# Altium PCB STM32F103.PcbDoc (part 2 of 5)
Units mil, origin at the board's own origin, x right, y up, seen from the top; angles counter-clockwise.
Board outline 3951 x 3526 mil, 2 copper layers (Top Layer, Bottom Layer); 148 components, 169 nets, 748 pads, 448 vias.
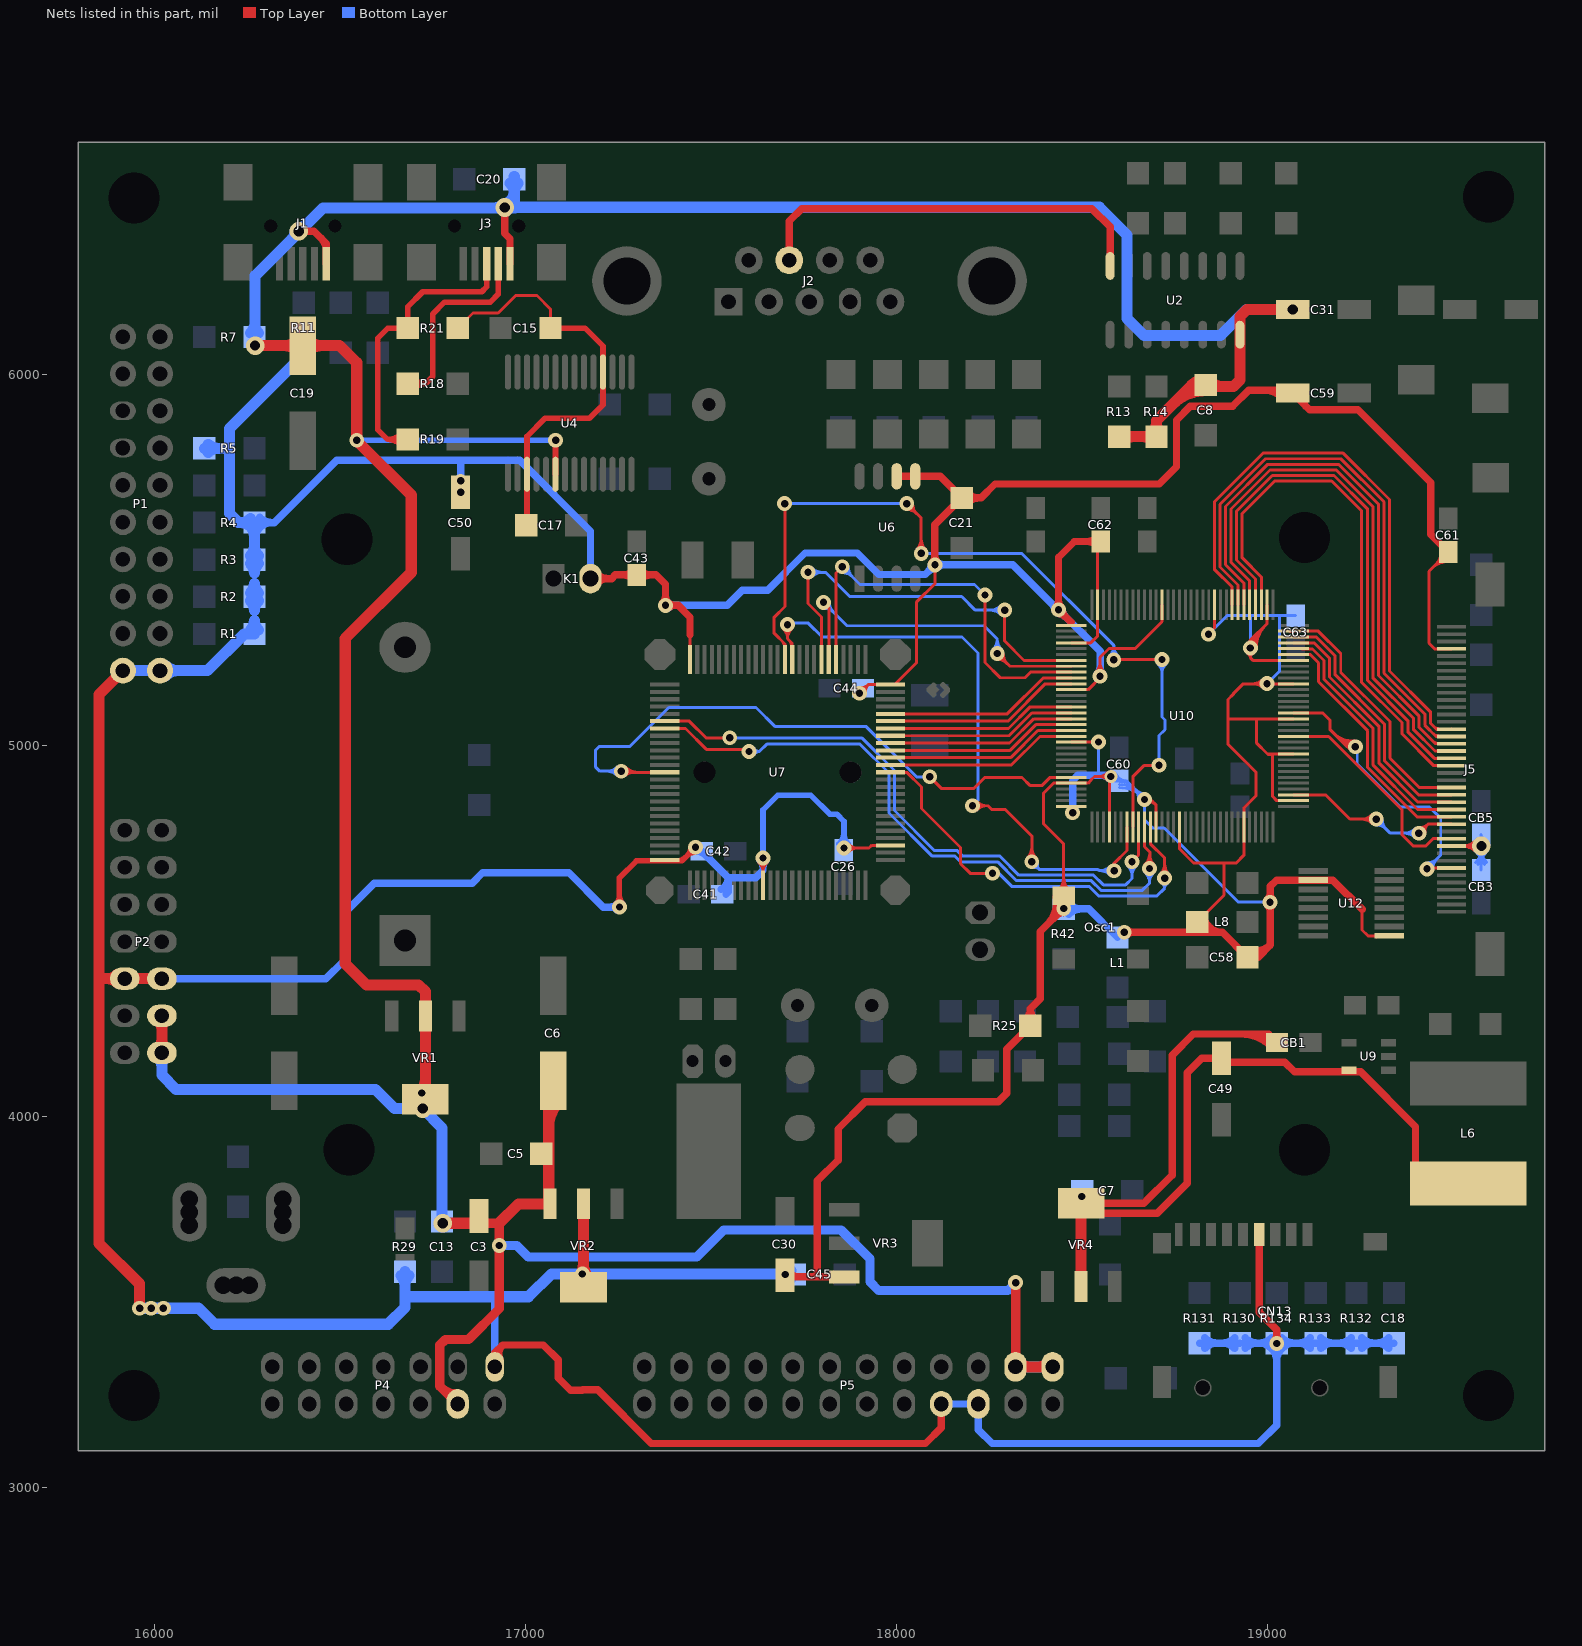
[diagram p2: the nets of this part, all layers, seen from the top]

## Via types
v1: diameter 40, hole 19.68, Top Layer to Bottom Layer, 402 vias
v2: diameter 35, hole 19.68, Top Layer to Bottom Layer, 21 vias
v3: diameter 50, hole 27.56, Top Layer to Bottom Layer, 19 vias
v4: diameter 40, hole 20, Top Layer to Bottom Layer, 6 vias

## Nets (pads, with @x,y where several pads share a name; then routed paths per layer and width w, separated by ;. In a path a pad name is that pad's centre, name@x,y a point inside that pad or via, vN(x,y) a via of type N, cw(c..) or ccw(c..) an arc to the next point about the centre after c; other vN are vias at no path point) (continued)
+3.3: C18.1 C21.1 C26.2 C30.1 C41.2 C42.2 C43.2 C44.2 C45.1 C50.1 C58.2 C59.1 C60.1 C61.1 C62.1 C63.1 CN13.4 J5.4 K1.2 L1.1 L8.1 Osc1.4 P1.1 P1.2 P2.9 P2.10 P4.14 P5.17 P5.19 R1.2 R2.2 R3.2 R4.2 R5.2 R11.1 R25.1 R29.1 R42.2 R130.1 R131.1 R132.1 R133.1 R134.1 U6.5 U6.6 U7.11 U7.28 U7.50 U7.75 U7.100 U10.4 U10.12 U10.16 U10.27 U10.34 U10.42 U10.48 U10.54 U10.58 U10.66 U10.75 U10.84 U10.95 U10.97 U10.100 U10.108 U10.117 U10.124 U10.128 U12.1 U12.10 VR2.4 VR3.3 | length 32721.9
  Top Layer w8: VR2.4@17153,3765.2 17153,3727.86 VR2.4@17157.55,3727.86 ; U7.75@17443,5232.27 17443,5299 ; v1@17628.54,4685.69 cw(c17601.22,4658.37) 17639.85,4658.37 cw(c17678.48,4658.37) v1@17651.16,4685.69 ; U7.11@17639.85,4624 v1(17639.85,4697) ; C30.1@17694.14,3560.11 cw(c17691.33,3552.98) C30.1@17699,3552.98 ; C30.1@17699,3568.45 C30.1@17699,3553 ; C30.1@17704.05,3559.52 ccw(c17705.76,3552.98) C30.1@17699,3552.98 ; v1(17858,4724) 17925.72,4724 17933,4731.28 U7.28@17983.35,4731.28 ; v1@17869.31,4712.69 cw(c17896.63,4685.37) 17896.63,4724 cw(c17896.63,4762.63) v1@17869.31,4735.31 ; v1(17900,5141) 17923.35,5164.35 ; v1@17901.87,5156.89 ccw(c17904.91,5182.8) 17923.35,5164.35 ; v1@17915.89,5142.87 cw(c17941.8,5145.91) 17923.35,5164.35 ; v1(18103,5487) 18103,5436 18053,5386 18053,5222.35 17995,5164.35 U7.50@17983.35,5164.35 17923.35,5164.35 ; Osc1.4@18435.15,4609.85 ccw(c18399.3,4645.7) 18450,4645.7 ccw(c18500.7,4645.7) Osc1.4@18464.85,4609.85 ; Osc1.4@18439.8,4573.33 ccw(c18421.88,4595) Osc1.4@18450,4595 ; Osc1.4@18440.81,4604.19 ccw(c18418.62,4626.38) 18450,4626.38 ccw(c18481.38,4626.38) Osc1.4@18459.19,4604.19 ; Osc1.4@18441.11,4575.98 cw(c18434.57,4562) v1@18450,4562 ; U10.128@18441.91,4835.91 U10.128@18470.79,4835.91 ; v1@18450,4544 v1(18450,4561) v1@18450,4562 ; Osc1.4@18458.89,4575.98 ccw(c18465.43,4562) v1@18450,4562 ; Osc1.4@18460.2,4573.33 cw(c18478.12,4595) Osc1.4@18450,4595 ; U10.117@18470.79,5009.13 v1@18544,5009.13 ; U10.108@18470.79,5150.87 18515.93,5150.87 v1@18550.03,5184.97 ; U10.100@18470.79,5276.85 18522.85,5276.85 18541.65,5295.65 U10.95@18541.65,5379.21 18541.65,5533.65 C62.1@18550,5542 ; U10.97@18470.79,5324.09 18470.79,5333 ; v1@18536.69,5198.31 ccw(c18509.37,5225.63) 18548,5225.63 ccw(c18586.63,5225.63) v1@18559.31,5198.31 ; v1(18548,5187) 18548,5237.84 18572.16,5262 18642.82,5262 18714.88,5334.07 U10.84@18714.88,5379.21 ; v2@18567.45,4907.45 ccw(c18544.41,4884.41) 18544.41,4917 ccw(c18544.41,4949.59) v2@18567.45,4926.55 ; v2@18571,4908 18573.15,4905.85 U10.4@18573.15,4780.79 ; v2(18577,4917) 18533,4917 18523.13,4907.13 18523.13,4906.09 18515.93,4898.9 U10.124@18470.79,4898.9 18422.35,4898.9 18396,4872.55 18396,4789 18450,4735 Osc1.4@18450,4595 ; v1@18670.56,4847.42 cw(c18679.1,4822.07) 18698.01,4840.99 ; 18688.9,4850.1 ccw(c18674.5,4835.71) v1(18668,4855) 18684,4855 18699.13,4839.87 U10.12@18699.13,4780.79 ; U10.16@18762.13,4780.79 18762.13,4721.87 18800,4684 18882,4684 ; L8.1@18810,4525 18882,4597 18882,4684 ; v1(18840,5300) 18856.61,5316.61 U10.75@18856.61,5379.21 ; v1@18945,5263 cw(c18976.38,5263) 18954.19,5285.19 ; v1@18945.79,5248.72 cw(c18939.88,5237) 18953,5237 ; v1@18948.75,5278.43 ccw(c18947.22,5284) 18953,5284 ; v1@18957.25,5278.43 cw(c18958.78,5284) 18953,5284 ; 18958.44,5166.61 ccw(c18958.44,5206.56) v1@18986.69,5178.31 ; v1@18960.21,5248.72 ccw(c18966.12,5237) 18953,5237 ; 18960.3,5166.61 cw(c18960.3,5129.3) v1@18986.69,5155.69 ; v1@18961,5263 cw(c19031.01,5263) 18981.51,5312.51 ; 18967.85,5298.85 ccw(c19003.7,5263) v1(18953,5263) ; v1@18969,5263 cw(c19058.33,5263) 18995.16,5326.16 ; 18977.75,5166.61 ccw(c18977.75,5187.25) v1@18992.34,5172.66 ; v1@18998,5166.61 18933.77,5166.61 18907,5139.84 18907,5138.16 18893,5124.16 18893,5072 ; U10.66@18998.35,5379.21 18998.35,5329.35 18953,5284 ; v1@19000,5166.61 U10.54@19069.21,5166.61 ; U10.34@19069.21,4851.65 19024,4851.65 19013,4862.65 19013,4975.64 19001.36,4975.64 18999.36,4977.64 ; U10.42@19069.21,4977.64 18999.36,4977.64 ; U10.48@19069.21,5072.13 18970,5072.13 ; U10.58@19069.21,5229.61 19068.61,5229 18961,5229 18953,5237 ; 19254,4559 19254,4503.5 19270,4487.5 U12.1@19327.36,4487.5 ; U12.1@19293.13,4484.76 ccw(c19286.51,4478.15) 19286.51,4487.5 ccw(c19286.51,4496.85) U12.1@19293.13,4490.24 ; 19442.09,5477.62 cw(c19486.48,5433.23) C61.1@19486.48,5496 ; 19454.16,5489.69 ccw(c19426.85,5517) C61.1@19465.48,5517 ; 19455.75,5491.27 cw(c19486.48,5460.54) C61.1@19486.48,5504 ; C61.1@19486.48,5522 19434,5469.52 19434,5275.95 19449,5260.95 J5.4@19495,5260.95 ; v1@18450,4562 Osc1.4@18450,4595 ; 18882,4684 18915,4684 18935.35,4704.35 U10.27@18935.35,4780.79 18935.35,4831.72 18967.74,4864.11 18967.74,4928.83 18893,5003.57 18893,5072 ; 18893,5072 18893.13,5072.13 18970,5072.13 ; 18953,5237 v1(18953,5263) ; v1(18953,5263) 18953,5284 ; 18970,5072.13 18970,5063.16 18969,5062.16 18969,5008 18999.36,4977.64
  Top Layer w15: v1@17244.16,4573.84 ccw(c17222.82,4595.18) 17253,4595.18 ccw(c17283.18,4595.18) v1@17261.84,4573.84 ; v1(17253,4565) 17253,4644 17298.5,4689.5 17421.5,4689.5 v1(17458,4726) ; U7.100@17408.96,4689.91 ccw(c17408.96,4721.2) 17431.08,4699.08 ; v1@17445.5,4726 cw(c17415.32,4726) 17436.66,4704.66 cw(c17458,4683.32) v1@17458,4713.5
  Top Layer w20: P4.14@16917,3326 16917,3364 16938,3385 ; P4.14@16930.76,3346.97 cw(c16962.33,3360.66) 16938,3385 ; K1.2@17175,5450 17232,5450 17242,5460 C43.2@17300,5460 17351.46,5460 17377,5434.46 v1(17377,5378) 17411,5378 17443,5346 17443,5299 ; K1.2@17189.14,5435.86 cw(c17223.28,5401.72) 17223.28,5450 cw(c17223.28,5498.28) K1.2@17189.14,5464.14 ; C43.2@17289.39,5449.39 ccw(c17263.79,5423.79) 17263.79,5460 ccw(c17263.79,5496.21) C43.2@17289.39,5470.61 ; C43.2@17310.61,5449.39 cw(c17336.21,5423.79) 17336.21,5460 cw(c17336.21,5496.21) C43.2@17310.61,5470.61 ; v1@17369.93,5385.07 ccw(c17352.86,5402.14) 17377,5402.14 ccw(c17401.14,5402.14) 17384.07,5385.07 ccw(c17401.14,5402.14) 17401.14,5378 ccw(c17401.14,5353.86) v1@17384.07,5370.93 ; C30.1@17699,3573.32 17703.87,3568.45 17786,3568.45 ; C30.1@17707.07,3582.07 ccw(c17739.96,3614.96) 17739.96,3568.45 ; VR3.3@17829.72,3562.99 ccw(c17816.54,3549.82) 17816.54,3568.45 ccw(c17816.54,3587.08) VR3.3@17829.72,3573.9 ; VR3.3@17858.8,3568.45 17786,3568.45 ; U6.6@18000,5725.59 U6.5@18050,5725.59 18116.91,5725.59 C21.1@18175,5667.5 ; v1@18095.93,5494.07 ccw(c18078.86,5511.14) 18103,5511.14 ccw(c18127.14,5511.14) v1@18110.07,5494.07 ; v1(18103,5487) 18103,5595.5 C21.1@18175,5667.5 ; P5.17@18120,3226 18120,3162 18077.5,3119.5 17338.5,3119.5 17194,3264 17154.33,3264 17153.33,3263 17121,3263 17088,3296 17088,3345 17048,3385 16938,3385 ; C21.1@18189.14,5653.36 cw(c18223.28,5619.22) 18223.28,5667.5 cw(c18223.28,5715.78) C21.1@18189.14,5681.64 ; R25.1@18346.29,4259.56 ccw(c18316.41,4291.3) 18360,4291.3 ; R25.1@18373.71,4259.56 cw(c18403.59,4291.3) 18360,4291.3 ; 18406,4518 ccw(c18345,4579.01) Osc1.4@18430.19,4592.63 ; v1@18428.93,5373.07 ccw(c18411.86,5390.14) 18436,5390.14 ccw(c18460.14,5390.14) v1@18443.07,5373.07 ; 18431.22,4543.22 cw(c18450,4524.44) v1@18450,4551 ; 18433.64,4545.64 ccw(c18418.27,4561) v1@18440,4561 ; 18433.71,4545.71 ccw(c18392.77,4586.65) Osc1.4@18449.94,4595.79 ; v1@18436,5356 cw(c18436,5331.86) 18453.07,5348.93 cw(c18470.14,5366) v1@18446,5366 ; v1@18450,4562 18387,4499 18387,4318.3 18360,4291.3 ; 18470.79,5333 18469,5333 v1(18436,5366) 18436,5507 18479,5550 C62.1@18550,5550 ; C62.1@18539.39,5539.39 ccw(c18513.79,5513.79) 18513.79,5550 ccw(c18513.79,5586.21) C62.1@18539.39,5560.61 ; v1(18613,4497) 18878,4497 ; v1@18620.07,4489.93 cw(c18637.14,4472.86) 18637.14,4497 cw(c18637.14,4521.14) v1@18620.07,4504.07 ; L8.1@18791.15,4518.3 ccw(c18821.33,4529.03) L8.1@18821.33,4497 ; L8.1@18810,4525 ccw(c18849.67,4539.1) 18849.67,4497 ; L8.1@18828.85,4531.7 ccw(c18878,4549.16) 18878,4497 ; C58.2@18950.91,4449.11 ccw(c18967.44,4502.56) 19007,4463 ; CN13.4@18976.69,3682.69 18976.69,3473.31 19024,3426 v1(19024,3389) ; 18983.55,4439.55 cw(c18956.36,4466.73) C58.2@18945,4430 ; 18990.68,5958 cw(c18990.68,5893.05) C59.1@19036.61,5938.98 ; v1@18998.93,4570.93 cw(c18979.44,4551.44) 19007,4551.44 ; v1@18998.93,4585.07 ccw(c18979.44,4604.56) 19007,4604.56 ; 19007,4556.27 cw(c19027.73,4556.27) v1@19013.07,4570.93 ; 19007,4599.73 ccw(c19027.73,4599.73) v1@19013.07,4585.07 ; v1@19016.93,3396.07 ccw(c18999.86,3413.14) 19024,3413.14 ccw(c19048.14,3413.14) v1@19031.07,3396.07 ; C59.1@19067.32,5950 19112.32,5905 19243.04,5905 19439,5709.04 19439,5569.48 C61.1@19486.48,5522 ; C59.1@19067.32,5958 18949,5958 18905,5914 18791,5914 18754,5877 18754,5751.7 18707.3,5705 18265,5705 18227.5,5667.5 C21.1@18175,5667.5 ; C59.1@19099.93,5941.28 ccw(c19117.24,5929.61) 19102.48,5914.84 ; 19254,4559 19175.5,4637.5 U12.10@19122.64,4637.5 19024.5,4637.5 19024,4638 19007,4621 19007,4463 ; 17786,3568.45 17786,3827 17842,3883 17842,3966.99 17915.01,4040 18274,4040 18297,4063 18297,4182 R25.1@18360,4245 18360,4291.3 ; 18878,4497 C58.2@18945,4430 ; C58.2@18945,4430 18974,4430 19007,4463
  Top Layer w30: P2.9@15899.39,4361.39 ccw(c15873.79,4335.79) 15873.79,4372 ccw(c15873.79,4408.21) P2.9@15899.39,4382.61 ; P1.2@15915,5202 15851,5138 15851,4372 ; v1(15960,3484) 15960,3550 15851,3659 15851,4372 ; P2.10@16020,4372 P2.9@15920,4372 15851,4372 ; VR2.4@17137.38,3559.42 ccw(c17092.41,3604.38) 17156,3604.38 ccw(c17219.59,3604.38) VR2.4@17174.62,3559.42 ; VR2.4@17156,3576 VR2.4@17156,3765.2
  Bottom Layer w8: R1.2@16251.12,5319.38 ccw(c16206.73,5363.77) 16269.5,5363.77 ccw(c16332.27,5363.77) R1.2@16287.88,5319.38 ; R2.2@16251.12,5382.62 cw(c16206.73,5338.23) 16269.5,5338.23 cw(c16332.27,5338.23) R2.2@16287.88,5382.62 ; R2.2@16251.12,5419.38 ccw(c16206.73,5463.77) 16269.5,5463.77 ccw(c16332.27,5463.77) R2.2@16287.88,5419.38 ; R3.2@16251.12,5482.62 cw(c16206.73,5438.23) 16269.5,5438.23 cw(c16332.27,5438.23) R3.2@16287.88,5482.62 ; R1.2@16256.77,5313.73 ccw(c16226.04,5344.46) 16269.5,5344.46 ccw(c16312.96,5344.46) R1.2@16282.23,5313.73 ; R2.2@16256.77,5388.27 cw(c16226.04,5357.54) 16269.5,5357.54 cw(c16312.96,5357.54) R2.2@16282.23,5388.27 ; R2.2@16256.77,5413.73 ccw(c16226.04,5444.46) 16269.5,5444.46 ccw(c16312.96,5444.46) R2.2@16282.23,5413.73 ; R3.2@16256.77,5488.27 cw(c16226.04,5457.54) 16269.5,5457.54 cw(c16312.96,5457.54) R3.2@16282.23,5488.27 ; R1.2@16269.5,5301 R2.2@16269.5,5401 R3.2@16269.5,5501 ; C44.2@17913,5139 C44.2@17916,5142 ; 18544,4920 v1(18544,5010) ; C60.1@18588,4905 C60.1@18620,4905 ; C60.1@18600,4887 cw(c18600,4795.26) v1@18664.87,4860.13 ; C60.1@18600,4895 cw(c18600,4822.57) 18651.21,4873.79 ; C60.1@18600,4903 cw(c18600,4849.89) 18637.56,4887.44 ; 18639.27,4885.73 cw(c18608.54,4855) v1@18652,4855 ; 18644.1,4880.9 ccw(c18668,4904.8) v1@18668,4871 ; 18652.93,4872.07 cw(c18635.86,4855) v1@18660,4855 ; v1(18668,4855) 18668,4800 18690,4778 18720.85,4778 18920.85,4578 v1(19006,4578) ; v1@18669,4856 C60.1@18620,4905 ; v1(18840,5300) 18890,5350 18953,5350 ; R130.1@18925,3390 R130.1@18935,3390 ; v1(18953,5263) 18953,5350 ; v1(18998,5167) 19032,5201 19032,5349 ; C63.1@19075,5350 18953,5350 ; C60.1@18620,4905 cw(c18620,4940.5) 18588.85,4923.47 ccw(c18620,4940.5) C60.1@18620,4905 ; v2@18574.81,4915.8 ccw(c18593.02,4925.76) 18593.02,4905 cw(c18593.02,4925.76) v2@18574.81,4915.8 ; C60.1@18581.83,4919.64 ccw(c18606.51,4933.13) 18606.51,4905 cw(c18606.51,4933.13) C60.1@18581.83,4919.64
  Bottom Layer w15: v1(17639.85,4697) 17639.85,4826.85 17679,4866 17769,4866 17820,4815 17839,4815 17858,4796 v1(17858,4724) ; C26.2@17844.63,4735.37 ccw(c17812.34,4767.66) 17858,4767.66 ; C26.2@17849.16,4732.84 ccw(c17827.82,4754.18) 17858,4754.18 ccw(c17888.18,4754.18) C26.2@17866.84,4732.84 ; 17858,4762.83 ccw(c17896.83,4762.83) C26.2@17869.37,4735.37
  Bottom Layer w20: P2.9@15920,4372 P2.10@16020,4372 16462,4372 16511,4421 16511,4548 16592,4629 16856,4629 16885,4658 17116,4658 17209,4565 v1(17253,4565) ; R4.2@16269.5,5601 16323,5601 16491,5769 16984,5769 17175,5578 K1.2@17175,5450 ; R4.2@16283.64,5586.86 cw(c16317.78,5552.72) 16317.78,5601 cw(c16317.78,5649.28) R4.2@16283.64,5615.14 ; v1@16817.93,5689.75 ccw(c16800.86,5706.82) 16825,5706.82 ccw(c16849.14,5706.82) v1@16832.07,5689.75 ; v2@16819.7,5708.7 cw(c16806.89,5695.89) 16825,5695.89 cw(c16843.11,5695.89) v2@16830.3,5708.7 ; v2@16819.7,5719.3 ccw(c16806.89,5732.11) 16825,5732.11 ccw(c16843.11,5732.11) v2@16830.3,5719.3 ; 16824,5769 16825,5768 v1(16825,5682.68) ; 16915,3515 16917,3513 P4.14@16917,3326 ; v1@17245.93,4557.93 ccw(c17228.86,4540.86) 17228.86,4565 ccw(c17228.86,4589.14) v1@17245.93,4572.07 ; v1(17377,5378) 17543.67,5378 17584.33,5418.66 17652.66,5418.66 17753,5519 17894,5519 17952,5461 18077,5461 v1(18103,5487) 18313,5487 v1@18435,5365 ; v1@17384.07,5370.93 cw(c17401.14,5353.86) 17401.14,5378 cw(c17401.14,5402.14) v1@17384.07,5385.07 ; C42.2@17458,4716 cw(c17458,4677.37) C42.2@17485.31,4704.69 ; C42.2@17475,4715 17546,4644 ; C41.2@17527.76,4613.14 ccw(c17510.77,4644) 17546,4644 ; C41.2@17540,4600 17546,4606 17546,4644 ; v1@17632.78,4689.93 cw(c17615.71,4672.86) 17639.85,4672.86 cw(c17663.99,4672.86) v1@17646.92,4689.93 ; v1@17639.85,4699 v1(17639.85,4697) 17639.85,4663.85 17620,4644 17546,4644 ; v1(17700,3575) v1@17684,3575 ; C45.1@17709.24,3562.69 ccw(c17684,3542.98) v1@17684,3575 ; C45.1@17709.24,3587.31 cw(c17684,3607.02) v1@17684,3575 ; v1@18093,5487 cw(c18068.86,5487) 18085.93,5469.93 cw(c18103,5452.86) v1@18103,5477 ; v1@18110.07,5479.93 cw(c18127.14,5462.86) 18127.14,5487 cw(c18127.14,5511.14) v1@18110.07,5494.07 ; P5.17@18120,3226 P5.19@18220,3226 18220,3157 18257.5,3119.5 18974.5,3119.5 19024,3169 v1(19024,3389) R134.1@19024,3390 ; 18415.51,5384.49 ccw(c18436,5404.97) v1@18436,5376 ; 18420.34,5379.66 cw(c18406.69,5366) v1@18426,5366 ; v1@18436,5356 cw(c18436,5331.86) 18453.07,5348.93 cw(c18470.14,5366) v1@18446,5366 ; v1(18436,5366) 18548,5254 v1(18548,5187) ; R42.2@18450,4560 18518,4560 L1.1@18595,4483 ; R42.2@18457.07,4553.93 cw(c18471.73,4539.27) R42.2@18471.73,4560 ; R42.2@18457.07,4568.07 ccw(c18476.56,4587.56) R42.2@18476.56,4560 ; R42.2@18464.14,4545.86 cw(c18498.28,4511.72) 18498.28,4560 cw(c18498.28,4608.28) R42.2@18464.14,4574.14 ; v1@18466.93,4826.07 ccw(c18449.86,4843.14) 18474,4843.14 ccw(c18498.14,4843.14) v1@18481.07,4826.07 ; v1(18474,4819) 18474,4906 18488,4920 18585,4920 C60.1@18591,4914 ; v1@18540.93,5194.07 ccw(c18523.86,5211.14) 18548,5211.14 ccw(c18572.14,5211.14) v1@18555.07,5194.07 ; 18551.65,4920 cw(c18551.65,4891.65) v2@18571.7,4911.7 ; R131.1@18816,3390 R130.1@18925,3390 ; R131.1@18830.14,3375.86 cw(c18864.28,3341.72) 18864.28,3390 cw(c18864.28,3438.28) R131.1@18830.14,3404.14 ; R130.1@18910.86,3375.86 ccw(c18876.72,3341.72) 18876.72,3390 ccw(c18876.72,3438.28) R130.1@18910.86,3404.14 ; R130.1@18935,3390 R134.1@19024,3390 ; R130.1@18939.14,3375.86 cw(c18973.28,3341.72) 18973.28,3390 cw(c18973.28,3438.28) R130.1@18939.14,3404.14 ; R134.1@18997.44,3390 cw(c18997.44,3362.44) 19016.93,3381.93 cw(c18999.86,3364.86) 19024,3364.86 cw(c19048.14,3364.86) 19031.07,3381.93 cw(c19050.56,3362.44) R134.1@19050.56,3390 ; R134.1@19002.27,3390 ccw(c19002.27,3410.73) R134.1@19016.93,3396.07 ; R134.1@19009.86,3404.14 cw(c18975.72,3438.28) 18975.72,3390 cw(c18975.72,3341.72) 19009.86,3375.86 cw(c18975.72,3341.72) 19024,3341.72 cw(c19072.28,3341.72) 19038.14,3375.86 cw(c19072.28,3341.72) 19072.28,3390 cw(c19072.28,3438.28) R134.1@19038.14,3404.14 ; R134.1@19031.07,3396.07 ccw(c19045.73,3410.73) R134.1@19045.73,3390 ; R133.1@19114.86,3375.86 ccw(c19080.72,3341.72) 19080.72,3390 ccw(c19080.72,3438.28) R133.1@19114.86,3404.14 ; R133.1@19143.14,3375.86 cw(c19177.28,3341.72) 19177.28,3390 cw(c19177.28,3438.28) R133.1@19143.14,3404.14 ; R132.1@19224.86,3375.86 ccw(c19190.72,3341.72) 19190.72,3390 ccw(c19190.72,3438.28) R132.1@19224.86,3404.14 ; R132.1@19253.14,3375.86 cw(c19287.28,3341.72) 19287.28,3390 cw(c19287.28,3438.28) R132.1@19253.14,3404.14 ; C18.1@19325.86,3375.86 ccw(c19291.72,3341.72) 19291.72,3390 ccw(c19291.72,3438.28) C18.1@19325.86,3404.14 ; C18.1@19340,3390 R132.1@19239,3390 R133.1@19129,3390 R134.1@19024,3390
  Bottom Layer w30: P1.2@15915,5202 P1.1@16015,5202 16143,5202 16242,5301 R1.2@16269.5,5301 ; v1(15960,3484) v1(15991,3484) v1(16024,3484) 16119,3484 16162,3441 16630,3441 16675,3486 16675,3517 ; P1.1@16029.14,5187.86 cw(c16063.28,5153.72) 16063.28,5202 cw(c16063.28,5250.28) P1.1@16029.14,5216.14 ; R5.2@16134.5,5801 16202,5801 ; R5.2@16145.11,5790.39 cw(c16170.71,5764.79) 16170.71,5801 cw(c16170.71,5837.21) R5.2@16145.11,5811.61 ; R1.2@16258.89,5311.61 ccw(c16233.29,5337.21) 16269.5,5337.21 ccw(c16305.71,5337.21) R1.2@16280.11,5311.61 ; R2.2@16258.89,5390.39 cw(c16233.29,5364.79) 16269.5,5364.79 cw(c16305.71,5364.79) R2.2@16280.11,5390.39 ; R2.2@16258.89,5411.61 ccw(c16233.29,5437.21) 16269.5,5437.21 ccw(c16305.71,5437.21) R2.2@16280.11,5411.61 ; R3.2@16258.89,5490.39 cw(c16233.29,5464.79) 16269.5,5464.79 cw(c16305.71,5464.79) R3.2@16280.11,5490.39 ; R3.2@16258.89,5511.61 ccw(c16233.29,5537.21) 16269.5,5537.21 ccw(c16305.71,5537.21) R3.2@16280.11,5511.61 ; R4.2@16258.89,5611.61 cw(c16233.29,5637.21) 16233.29,5601 cw(c16233.29,5564.79) 16258.89,5590.39 cw(c16233.29,5564.79) 16269.5,5564.79 cw(c16305.71,5564.79) R4.2@16280.11,5590.39 ; R3.2@16269.5,5501 R4.2@16269.5,5601 16226,5601 16202,5625 16202,5801 ; R11.1@16402,6058.5 16402,6054.23 16202,5854.23 16202,5801 ; 16675,3544 R29.1@16675,3568 ; R29.1@16675,3582.5 R29.1@16675,3568 ; v1@17684,3576 v1(17153,3576) 17069.4,3576 17008.4,3515 16915,3515 16677,3515 16675,3517 ; 16675,3517 R29.1@16675,3568 ; 16675,3546.29 cw(c16711.21,3546.29) 16685.61,3571.89 ccw(c16711.21,3546.29) 16675,3546.29 ; 16675,3546.29 ccw(c16638.79,3546.29) 16664.39,3571.89 cw(c16638.79,3546.29) 16675,3546.29 ; v1@17686.37,3576 cw(c17686.37,3536.37) 17714.39,3564.39 ccw(c17686.37,3536.37) v1@17686.37,3576 ; v1@17691.2,3576 ccw(c17691.2,3608.8) 17714.39,3585.61 cw(c17691.2,3608.8) v1@17691.2,3576
  other v2: 16825,5714
+3.3A: 
+3.3IN: C15.2 C17.2 R21.2 U4.4 U4.17 | length 1168.3
  Top Layer w8: R21.2@16817.5,6125 16858.5,6166 16926.26,6166 16973.26,6213 17030.5,6213 17067.5,6176 C15.2@17067.5,6125 ; C17.2@17001.5,5594 17001.5,5586 C17.2@17002,5586
  Top Layer w15: C17.2@17002,5586 17003.84,5587.84 17003.84,5594 U4.17@17003.84,5731.2 17003.84,5833.16 17052.68,5882 17172,5882 17208.57,5918.57 U4.4@17208.57,6006.79 17208.57,6076.43 17160,6125 C15.2@17067.5,6125
+5: C3.1 C5.1 C6.1 C8.2 C13.1 C19.1 C20.2 C31.1 J1.1 J3.1 P2.12 P2.14 P4.11 P5.22 P5.24 R7.2 R13.1 R14.1 U2.16 U4.20 VR1.4 VR2.3 | length 14081.8
  Top Layer w15: U4.20@17080.61,5731.2 v1@17080.61,5822.61
  Top Layer w20: v3(16389,6386) 16430,6386 16462.99,6353.01 J1.1@16462.99,6297.94 ; 16449.38,6366.62 cw(c16416.14,6333.38) J1.1@16463.15,6333.38 ; v3(16944,6450) 16944,6380 16957.99,6366.01 J3.1@16957.99,6297.94
  Top Layer w25: 16774,3269 ccw(c16811.87,3306.86) P4.11@16815.74,3253.45 ; P4.11@16817,3226 16769,3274 16769,3385 16784,3400 16846,3400 16929,3483 v4(16929,3653) 16929,3713 C3.1@16875,3713 ; C3.1@16884.26,3703.74 cw(c16906.62,3681.37) 16906.62,3713 cw(c16906.59,3744.58) C3.1@16884.26,3722.25 ; P5.22@18320,3326 18320.5,3326.5 v4(18320.5,3553)
  Top Layer w30: P2.14@16009.39,4182.61 ccw(c15983.79,4208.21) 16020,4208.21 ccw(c16056.21,4208.21) P2.14@16030.61,4182.61 ; P2.12@16009.39,4261.39 cw(c15983.79,4235.79) 16020,4235.79 cw(c16056.21,4235.79) P2.12@16030.61,4261.39 ; v3(16020,4172) P2.12@16020,4272 ; v3(16271.05,6077.95) C19.1@16400,6077.95 16499.05,6077.95 16545,6032 v1(16545,5823) 16545,5822 16692,5675 16692,5466 16514,5288 16514,4413 16572,4355 16712,4355 16730,4337 VR1.4@16730,4271.2 VR1.4@16730,4046.8 ; C19.1@16385.55,6063.5 ccw(c16350.67,6028.62) 16350.67,6077.95 ccw(c16350.67,6127.28) C19.1@16385.55,6092.4 ; C19.1@16414.45,6063.5 cw(c16449.33,6028.62) 16449.33,6077.95 cw(c16449.33,6127.28) C19.1@16414.45,6092.4 ; VR1.4@16715.93,4029.07 ccw(c16681.96,4063.04) VR1.4@16730,4063.04 ; VR1.4@16716.46,4060.46 cw(c16683.79,4027.79) VR1.4@16730,4027.79 ; VR1.4@16716.46,4067.54 ccw(c16683.79,4100.21) 16730,4100.21 ; v3(16777,3713) 16855.32,3713 C3.1@16875,3732.68 ; 16929,3713 16981.2,3765.2 VR2.3@17065.45,3765.2 17062.45,3768.2 17062.45,4098.45 C6.1@17074,4110 ; 17062.45,3974.11 cw(c17154.63,3974.11) C6.1@17089.45,4039.29 ; P5.22@18320,3326 P5.24@18420,3326 ; P5.22@18330.61,3315.39 cw(c18356.21,3289.79) 18356.21,3326 cw(c18356.21,3362.21) P5.22@18330.61,3336.61 ; P5.24@18409.39,3315.39 ccw(c18383.79,3289.79) 18383.79,3326 ccw(c18383.79,3362.21) P5.24@18409.39,3336.61 ; R13.1@18600,5832.5 R14.1@18700,5832.5 18700,5876.39 18795.11,5971.5 C8.2@18833,5971.5 ; R14.1@18710.61,5843.11 cw(c18736.21,5868.71) 18700,5868.71 cw(c18663.79,5868.71) R14.1@18689.39,5843.11 ; 18742.72,5919.1 cw(c18833,5828.82) C8.2@18833,5956.5 ; 18793.93,5970.32 cw(c18833,5931.24) C8.2@18833,5986.5 ; C8.2@18822.39,5960.89 ccw(c18796.79,5935.29) 18796.79,5971.5 ccw(c18796.79,6007.71) C8.2@18822.39,5982.11 ; C8.2@18835,5967.5 18907.5,5967.5 18925,5985 U2.16@18925,6107.48 18925,6156 18944,6175 v3(19067.32,6175) C31.1@19064,6171.68 ; C8.2@18843.61,5982.11 ccw(c18878.87,6017.37) 18878.87,5967.5 ; VR1.4@16717,4030 ccw(c16697.5,4056) VR1.4@16730,4056 ; VR1.4@16717,4030 ccw(c16697.5,4056) VR1.4@16730,4056 ; VR1.4@16717,4030 ccw(c16697.5,4056) VR1.4@16730,4056 ; 18636.21,5832.5 cw(c18636.21,5868.71) 18610.61,5843.11 ccw(c18636.21,5868.71) 18636.21,5832.5 ; 18636.21,5832.5 ccw(c18636.21,5796.29) 18610.61,5821.89 cw(c18636.21,5796.29) 18636.21,5832.5 ; 18663.79,5832.5 cw(c18663.79,5796.29) 18689.39,5821.89 ccw(c18663.79,5796.29) 18663.79,5832.5 ; 18663.79,5832.5 ccw(c18663.79,5868.71) R14.1@18689.39,5843.11 ; 18663.79,5832.5 ccw(c18663.79,5868.71) R14.1@18689.39,5843.11 ; C8.2@18844.27,5981.4 ccw(c18875,6008.42) 18875,5967.5 cw(c18875,6008.42) C8.2@18844.27,5981.4
  Bottom Layer w15: v1(16545,5823) v1(17081,5823)
  Bottom Layer w25: v4(16929,3653) 16976,3653 17007,3622 17461,3622 17534,3695 17850,3695 17928,3617 17928,3555.5 17952,3531.5 18299,3531.5 v4(18320.5,3553)
  Bottom Layer w30: P2.14@16009.39,4161.39 cw(c15983.79,4135.79) 16020,4135.79 cw(c16056.21,4135.79) P2.14@16030.61,4161.39 ; v3(16020,4172) 16020,4112 16058.45,4073.55 16595.45,4073.55 16647,4022 v3(16723,4022) 16775,3970 C13.1@16775,3717.5 16777,3715.5 v3(16777,3713) ; R7.2@16258.89,6111.61 ccw(c16229.67,6140.83) 16271,6140.83 ; v3(16271.05,6077.95) v3(16271.05,6077.95) ; R7.2@16271,6101 16271,6266 16454,6449 16971,6449 16969.5,6450.5 ; 16271,6133.59 ccw(c16302.09,6133.59) R7.2@16280.11,6111.61 ; 16370.51,6365.51 ccw(c16350.03,6386) v3@16379,6386 ; v3@16389,6396 ccw(c16389,6424.97) 16409.49,6404.49 ; 16917.44,6449 ccw(c16917.44,6476.56) v3@16936.93,6457.07 ; v3@16942.33,6459.86 ccw(c16936.91,6492) 16969.5,6492 ; v3@16951.07,6457.07 ccw(c16970.56,6476.56) 16970.56,6449 ; 16969.5,6472.5 16969.5,6492 ; C20.2@16969.5,6533.5 C20.2@16969.5,6526 16969.5,6492 ; P5.22@18320,3326 P5.24@18420,3326 ; P5.22@18330.61,3315.39 cw(c18356.21,3289.79) 18356.21,3326 cw(c18356.21,3362.21) P5.22@18330.61,3336.61 ; P5.24@18409.39,3315.39 ccw(c18383.79,3289.79) 18383.79,3326 ccw(c18383.79,3362.21) P5.24@18409.39,3336.61 ; v3(19067.32,6175) 18943,6175 18873,6105 18667,6105 18621,6151 18621,6376 18546.5,6450.5 16969.5,6450.5 ; 16969.5,6450.5 16969.5,6492 ; 16969.5,6489.79 cw(c17005.71,6489.79) 16980.11,6515.39 ccw(c17005.71,6489.79) 16969.5,6489.79 ; 16969.5,6489.79 ccw(c16933.29,6489.79) 16958.89,6515.39 cw(c16933.29,6489.79) 16969.5,6489.79 ; v3@16951.07,6442.93 cw(c16969.35,6424.65) 16969.35,6450.5 ccw(c16969.35,6424.65) v3@16951.07,6442.93
  other v1: 16720,4064
+5A: C7.1 C49.1 CB1.1 L6.1 U9.5 VR4.4 | length 2812.5
  Top Layer w20: VR4.4@18491.93,3777.93 ccw(c18518.6,3804.6) VR4.4@18518.6,3766.88 ; VR4.4@18506.07,3792.07 ccw(c18566.88,3852.88) 18566.88,3766.88 ; C49.1@18875,4157.68 18821.68,4157.68 18783,4119 18783,3821 18701.88,3739.88 18524,3739.88 VR4.4@18497,3766.88 18666,3766.88 18742,3842.88 18742,4166 18799,4223 19002,4223 CB1.1@19025,4200 ; C49.1@18880,4147 19046,4147 19072,4121 19250,4121 19398,3973 L6.1@19398,3867 ; 18928.26,4223 cw(c18928.26,4108.26) CB1.1@19009.39,4189.39 ; 18976.54,4223 cw(c18976.54,4156.54) CB1.1@19023.54,4203.54
  Top Layer w30: VR4.4@18497,3542.47 VR4.4@18497,3766.88
  other v1: 18499,3785
B2_TFT: J5.23 U10.63 | length 697.2
  Top Layer w8: U10.63@19060,5307.6 U10.63@19069.21,5307.6 ; U10.63@19069.21,5308.35 19136.22,5308.35 19196.55,5248.02 19196.55,5197.14 19329,5064.69 19329,4966.01 19408.08,4886.93 J5.23@19495,4886.93
B3_TFT: J5.24 U10.62 | length 689.6
  Top Layer w8: U10.62@19069.21,5292.6 19130.75,5292.6 19181.55,5241.8 19181.55,5190.93 19314,5058.48 19314,4959.8 19406.55,4867.25 J5.24@19495,4867.25
B4_TFT: J5.25 U10.61 | length 691.2
  Top Layer w8: U10.61@19069.21,5276.85 19104,5276.85 19104.75,5276.1 19126.04,5276.1 19166.55,5235.59 19166.55,5184.72 19299,5052.27 19299,4953.59 19405.03,4847.56 J5.25@19495,4847.56
B5_TFT: J5.26 U10.60 | length 692.8
  Top Layer w8: U10.60@19069.21,5261.1 19092,5261.1 19092.75,5260.35 19120.57,5260.35 19151.55,5229.38 19151.55,5178.5 19284,5046.05 19284,4947.37 19403.5,4827.88 J5.26@19495,4827.88
B6_TFT: J5.27 U10.59 | length 694.5
  Top Layer w8: U10.59@19069.21,5245.35 19114.36,5245.35 19136.55,5223.16 19136.55,5172.29 19269,5039.84 19269,4941.16 19401.97,4808.19 J5.27@19495,4808.19
B7_TFT: J5.28 U10.35 | length 711.9
  Top Layer w8: U10.35@19069.21,4867.4 19155.6,4867.4 19221,4802 v1(19292,4802) ; v1@19280.69,4790.69 ccw(c19253.37,4763.37) 19253.37,4802 ccw(c19253.37,4840.63) v1@19280.69,4813.31 ; v1(19407,4764) 19431.51,4788.51 ; v1@19408.27,4779.95 ccw(c19410.62,4809.39) 19431.5,4788.5 ; v1@19422.95,4765.27 cw(c19452.39,4767.62) 19431.5,4788.5 ; J5.28@19495,4788.51 19431.51,4788.51
  Bottom Layer w8: v1@19292,4786 cw(c19292,4747.37) 19319.31,4774.69 cw(c19346.63,4802) v1@19308,4802 ; v1(19292,4802) 19330,4764 v1(19407,4764) ; v1@19395.69,4752.69 ccw(c19368.37,4725.37) 19368.37,4764 ccw(c19368.37,4802.63) v1@19395.69,4775.31
CS: U7.88 U10.123 | length 1848.3
  Top Layer w8: v1(17258,4931) 17260.87,4928.13 U7.88@17375.09,4928.13 ; v1@17263.66,4936.66 ccw(c17284.23,4957.23) 17284.23,4928.13 ; v1@17269.31,4919.69 cw(c17289.71,4899.29) 17289.71,4928.13 ; v1@17269.31,4942.31 ccw(c17303.55,4976.55) 17303.55,4928.13 ; v1(18089,4916) 18120,4885 18208,4885 18237.02,4914.02 18337.98,4914.02 18360,4892 18391,4892 18413.65,4914.65 U10.123@18470.79,4914.65
  Bottom Layer w8: v1@17246.69,4919.69 ccw(c17219.37,4892.37) 17219.37,4931 ccw(c17219.37,4969.63) v1@17246.69,4942.31 ; v1(17258,4931) 17200,4931 17189,4942 17189,4988 17198,4997 17280,4997 17386,5103 17621,5103 17673,5051 17918.07,5051 18053.07,4916 v1(18089,4916) v1@18105,4916
CTS: J2.7 U2.8 | length 1109.8
  Top Layer w20: J2.7@17710.47,6307.89 17710.47,6413.47 17744,6447 18526,6447 18575,6398 U2.8@18575,6292.52
D0: U7.61 U10.7 | length 2009.4
  Top Layer w8: v1@17694.82,5314.55 cw(c17668.88,5288) 17706,5288 ; v1(17706,5326) 17706,5288 ; 17709.47,5284.53 cw(c17691.08,5266.14) U7.61@17717.09,5266.14 ; v1@17717.18,5314.55 ccw(c17743.12,5288) 17706,5288 ; U7.61@17718.59,5232.27 17718.59,5275.41 17706,5288 ; v1(18204.54,4838) 18246,4838 18255.63,4828.37 18291.85,4828.37 18364,4756.21 v1@18364,4688 ; v1@18215.85,4826.69 cw(c18243.17,4799.37) 18243.17,4838 cw(c18243.17,4876.63) v1@18215.85,4849.31 ; v1@18352.69,4698.31 ccw(c18325.37,4725.63) 18364,4725.63 ccw(c18402.63,4725.63) v1@18375.31,4698.31 ; v1@18366,4690 v1@18364,4688 ; v1(18586,4663) 18586,4683 18620.39,4717.39 U10.7@18620.39,4780.79 ; v1(18364,4687) v1@18364,4688 ; v1(18364,4687) 18363,4686 18363,4687 v1@18364,4688 ; v1(18364,4687) v1@18364,4688
  Bottom Layer w8: v1@17701,5315 17702,5314 17718,5330 17762,5330 17799.3,5292.7 18176,5292.7 18219,5249.7 18219,4852.46 v1(18204.54,4838) ; v1(18364,4687) 18385,4666 ; v1@18367.23,4671.33 cw(c18371.17,4652.17) 18385,4666 ; v1@18379.67,4683.77 ccw(c18398.83,4679.83) 18385,4666 ; v1@18574.69,4651.69 ccw(c18547.37,4624.37) 18547.37,4663 ccw(c18547.37,4701.63) v1@18574.69,4674.31 ; v1(18586,4663) 18546,4663 18543,4666 18385,4666
D1: U7.62 U10.8 | length 2490.4
  Top Layer w8: 17690.98,5281.66 cw(c17675.45,5266.14) U7.62@17697.41,5266.14 ; U7.62@17698.91,5232.27 17698.91,5273.73 17670,5302.64 17670,5346 17699,5375 v1@17699,5651 ; v1@18027,5636 cw(c18027,5597.37) 18054.31,5624.69 cw(c18081.63,5652) v1@18043,5652 ; v1(18027,5652) 18066,5613 v1(18066,5518) ; v1@18054.69,5529.31 ccw(c18027.37,5556.63) 18066,5556.63 ccw(c18104.63,5556.63) v1@18077.31,5529.31 ; v1@18585,5244 v1@18586,5245 ; v1@18586,5232 v1(18715,5232) ; U10.8@18636.14,4780.79 18636.14,4916.14 18666,4946 18707,4946 v1(18707,4947)
  Bottom Layer w8: v1(17698,5652) v1(18027,5652) ; v1(18066,5518) 18337.21,5518 18585,5270.21 v1@18585,5244 ; v1@18573.69,5242.31 ccw(c18546.37,5269.63) 18585,5269.63 ccw(c18623.63,5269.63) v1@18596.31,5242.31 ; v1@18703.69,5220.69 cw(c18676.37,5193.37) 18715,5193.37 cw(c18753.63,5193.37) v1@18726.31,5220.69 ; v1(18707,4947) 18707,5027 18723,5043 18723,5068.84 18715,5076.84 18715,5245 v1@18713,5247
  other v1: 18585,5231
D1+: J3.3 R19.2 R21.1 | length 881.6
  Top Layer w15: R19.2@16666.59,5809.09 ccw(c16628.18,5770.68) 16628.18,5825 ccw(c16628.18,5879.32) R19.2@16666.59,5840.91 ; R21.1@16682,6113 R21.1@16682,6125 ; R19.2@16682.5,5825 16628,5825 16602,5851 16602,6098 16629,6125 R21.1@16682,6125 ; R21.1@16682.5,6125 R21.1@16682,6125 ; J3.3@16895,6297.94 16895,6236 16882,6223 16723,6223 16682,6182 R21.1@16682,6125
D1-: J3.2 R18.1 | length 592.7
  Top Layer w15: R18.1@16682.5,5975 16730,5975 ; R18.1@16699.91,5960.75 cw(c16730,5936.11) 16730,5975 ; R18.1@16699.91,5989.25 ccw(c16730,6013.89) 16730,5975 ; J3.2@16926.5,6297.94 16926.5,6216.5 16905,6195 16782,6195 16750,6163 16750,5995 16730,5975
D2: U7.81 U10.9 | length 1724.9
  Top Layer w8: U7.81@17375.09,5065.93 17441.07,5065.93 17486,5021 v1(17550,5021) ; v1(18634,4687) 18651.89,4704.89 U10.9@18651.89,4780.79
  Bottom Layer w8: v1(17550,5021) 17905.64,5021 17994,4932.64 17994,4824.85 18100.85,4718 18161.85,4718 18177.85,4702 18278.21,4702 18329.21,4651 18530.64,4651 18556.64,4625 18617,4625 18634,4642 v1(18634,4687) ; v1@18622.69,4675.69 cw(c18595.37,4648.37) 18634,4648.37 cw(c18672.63,4648.37) v1@18645.31,4675.69 ; v1@18631,4686 v1@18633,4686 ; v1@18633,4686 v1(18634,4687) ; v1@18633,4686 v1(18634,4687) ; v1@18633,4686 v1(18634,4687)
D3: U7.82 U10.10 | length 1906.4
  Top Layer w8: U7.82@17375.09,5046.24 17430.76,5046.24 17487,4990 17596,4990 v1(17602,4984) ; U10.10@18667.64,4780.79 18667.64,4727.64 18682,4713.28 18682,4669 v1(18681,4669) ; v1@18669.69,4680.31 ccw(c18639.96,4710.04) 18682,4710.04 ; v1@18675.34,4674.66 ccw(c18659.27,4690.73) 18682,4690.73 ; 18682,4705.21 ccw(c18717.21,4705.21) v1@18692.31,4680.31
  Bottom Layer w8: v1(17602,4984) 17630,4984 ; v1@17615.78,4975.88 cw(c17630,4967.5) 17630,4984 ; v1@17615.78,4992.12 ccw(c17630,5000.5) 17630,4984 ; v1@18669.69,4657.69 cw(c18642.37,4630.37) 18681,4630.37 cw(c18719.63,4630.37) v1@18692.31,4657.69 ; v1(18681,4669) 18681,4629 18662,4610 18550.43,4610 18524.43,4636 18323,4636 18272,4687 18171.64,4687 18155.64,4703 18094.64,4703 17979,4818.64 17979,4926.43 17901.43,5004 17650,5004 17630,4984
D4: U7.38 U10.11 | length 1220.5
  Top Layer w8: U7.38@17983.35,4928.13 18027.15,4928.13 18067,4888.28 18067,4830.76 18172,4725.76 18172,4682 18198,4656 v1(18258,4656) ; U10.11@18683.39,4780.79 18683.39,4735.64 18722,4697.03 v1(18722,4643) v1@18720.03,4644.97 ; v1@18710.69,4654.31 ccw(c18683.37,4681.63) 18722,4681.63 ccw(c18760.63,4681.63) v1@18733.31,4654.31
  Bottom Layer w8: v1(18258,4656) 18274.85,4656 18309.85,4621 18518.21,4621 18544.21,4595 18701,4595 18722,4616 ; v1@18714.32,4628.97 cw(c18707.22,4616) 18722,4616 ; v1(18722,4643) 18722,4616 ; v1@18729.68,4628.97 ccw(c18736.78,4616) 18722,4616
D5: U7.39 U10.116 | length 729.8
  Top Layer w8: 18193.82,4947.82 U7.39@17983.35,4947.82 18308.82,4947.82 18385.88,5024.88 U10.116@18470.79,5024.88
D6: U7.40 U10.115 | length 517.7
  Top Layer w8: U7.40@17983.35,4967.5 18307.29,4967.5 18380.42,5040.63 U10.115@18470.79,5040.63
D7: U7.41 U10.114 | length 516.1
  Top Layer w8: U7.41@17983.35,4987.19 18305.76,4987.19 18374.95,5056.38 U10.114@18470.79,5056.38
D8: U7.42 U10.113 | length 514.5
  Top Layer w8: U7.42@17983.35,5006.87 18304.23,5006.87 18369.49,5072.13 U10.113@18470.79,5072.13
D9: U7.43 U10.112 | length 512.8
  Top Layer w8: U7.43@17983.35,5026.56 18302.71,5026.56 18364.02,5087.87 U10.112@18470.79,5087.87
D10: U7.44 U10.111 | length 511.2
  Top Layer w8: U7.44@17983.35,5046.24 18301.18,5046.24 18358.56,5103.62 U10.111@18470.79,5103.62
D11: U7.45 U10.107 | length 529.1
  Top Layer w8: U7.45@17983.35,5065.93 18299.65,5065.93 18400.33,5166.61 U10.107@18470.79,5166.61
D12: U7.46 U10.106 | length 527.5
  Top Layer w8: U7.46@17983.35,5085.61 18298.12,5085.61 18394.87,5182.36 U10.106@18470.79,5182.36
D13: U7.55 U10.105 | length 1171.6
  Top Layer w8: U7.55@17836.7,5232.27 17836.7,5465.23 v1(17853.47,5482) ; v1(18238,5406) 18238,5223.86 18279,5182.86 18345.86,5182.86 18361.11,5198.11 U10.105@18470.79,5198.11
  Bottom Layer w8: v1@17853.47,5466 cw(c17853.47,5427.37) 17880.78,5454.69 cw(c17908.09,5482) v1@17869.47,5482 ; v1(17853.47,5482) 17901.47,5434 18210,5434 v1(18238,5406)
D14: U7.56 U10.104 | length 1103.5
  Top Layer w8: v1(17803,5386) 17817.02,5371.98 U7.56@17817.02,5232.27 ; v1@18271,5232 cw(c18271,5193.37) 18298.31,5220.69 cw(c18325.63,5248) v1@18287,5248 ; v1(18271,5248) 18305.14,5213.86 U10.104@18470.79,5213.86
  Bottom Layer w8: v1@17803,5370 cw(c17803,5331.37) 17830.31,5358.69 cw(c17857.63,5386) v1@17819,5386 ; v1(17803,5386) 17866.04,5322.96 18217.08,5322.96 18235.04,5322.96 18271,5287 v1(18271,5248) ; v1@18259.69,5259.31 ccw(c18232.37,5286.63) 18271,5286.63 ccw(c18309.63,5286.63) v1@18282.31,5259.31
D15: U7.57 U10.103 | length 1228.1
  Top Layer w8: v1(17761,5467) 17761,5383.15 17797.33,5346.82 U7.57@17797.33,5232.27 ; v1(18291,5365) 18291,5281.61 18343,5229.61 U10.103@18470.79,5229.61
  Bottom Layer w8: v1(17761,5467) 17808.27,5467 17873.27,5402 18175,5402 18212,5365 v1(18291,5365) ; v1@17772.31,5455.69 cw(c17799.63,5428.37) 17799.63,5467 cw(c17799.63,5505.63) v1@17772.31,5478.31 ; v1@18279.69,5353.69 ccw(c18252.37,5326.37) 18252.37,5365 ccw(c18252.37,5403.63) v1@18279.69,5376.31
DCLK: J5.30 U10.45 | length 595.5
  Top Layer w8: U10.45@19069.21,5024.88 19164.06,5024.88 19361,4827.95 19361,4760.21 19391.21,4730 19426,4730 19445.14,4749.14 J5.30@19495,4749.14
DEN: J5.34 U10.49 | length 1027.8
  Top Layer w8: U10.49@19069.21,5087.87 19148.34,5087.87 19167,5069.22 19167,5044 19214,4997 ; 19178,5033 ccw(c19227.34,5082.34) v1@19234.38,5012.92 ; 19189.92,5021.08 ccw(c19229.54,5060.7) v1@19235.19,5004.96 ; 19201.83,5009.17 ccw(c19231.73,5039.07) v1(19236,4997) 19214,4997 ; 19213.75,4997.25 ccw(c19233.93,5017.43) v1@19236.81,4989.04 ; v1@19220.78,4992.07 ccw(c19214,4989.88) 19214,4997 ; v1@19220.78,5001.93 cw(c19214,5004.12) 19214,4997 ; v1(19429,4668) 19431.4,4670.4 J5.34@19495,4670.4
  Bottom Layer w8: v1(19236,4997) 19241,4992 19241,4950 19357,4834 19436,4834 19466,4804 19466,4705 v1(19429,4668) ; v1@19426,4670 v1@19428,4668 ; v1@19429,4684 ccw(c19429,4722.63) 19456.31,4695.31 ccw(c19483.63,4668) v1@19445,4668
DISP: CB3.2 CB5.2 J5.31 | length 1117.9
  Top Layer w10: J5.31@19495,4729.45 v3(19575.55,4729.45) ; v3@19561.41,4715.31 ccw(c19527.27,4681.17) 19527.27,4729.45 ccw(c19527.27,4777.73) v3@19561.41,4743.59
  Bottom Layer w8: CB5.2@19567.55,4748.87 ccw(c19562.96,4760) CB5.2@19575,4760 ; v3(19575.55,4729.45) v3@19575,4728.9 ; CB5.2@19582.59,4749.23 cw(c19586.43,4760) CB5.2@19575,4760 ; 19575,4701.38 cw(c19543.62,4701.38) 19565.81,4679.19 ccw(c19543.62,4701.38) 19575,4701.38 ; 19575,4701.38 ccw(c19606.38,4701.38) 19584.19,4679.19 cw(c19606.38,4701.38) 19575,4701.38 ; 19575,4704.3 cw(c19625.7,4704.3) 19589.85,4740.15 ccw(c19625.7,4704.3) 19575,4704.3 ; 19575,4704.3 ccw(c19524.3,4704.3) 19560.15,4740.15 cw(c19524.3,4704.3) 19575,4704.3 ; v3@19575,4720.7 cw(c19524.3,4720.7) 19560.15,4684.85 ccw(c19524.3,4720.7) v3@19575,4720.7 ; v3@19575,4720.7 ccw(c19625.7,4720.7) 19589.85,4684.85 cw(c19625.7,4720.7) v3@19575,4720.7 ; v3@19575,4723.62 cw(c19606.38,4723.62) 19584.19,4745.81 ccw(c19606.38,4723.62) v3@19575,4723.62 ; v3@19575,4723.62 ccw(c19543.62,4723.62) 19565.81,4745.81 cw(c19543.62,4723.62) v3@19575,4723.62 ; v3@19575,4728.9 CB3.2@19575,4665 v3@19575,4728.9 ; v3@19575,4728.9 19575,4729.45 CB5.2@19575,4760 ; v3@19560.7,4714.6 cw(c19526.18,4680.08) 19575,4680.08 ccw(c19526.18,4680.08) v3@19560.7,4714.6 ; v3@19566.36,4720.26 cw(c19545.49,4699.39) 19575,4699.39 ccw(c19545.49,4699.39) v3@19566.36,4720.26 ; CB3.2@19575,4677.42 cw(c19627.58,4677.42) 19590.4,4714.6 ccw(c19627.58,4677.42) CB3.2@19575,4677.42 ; 19575,4696.74 cw(c19608.26,4696.74) 19584.74,4720.26 ccw(c19608.26,4696.74) 19575,4696.74
G2_TFT: J5.15 U10.72 | length 1601.1
  Top Layer w8: U10.72@18903.86,5379.21 18903.86,5427.14 18855.87,5475.13 18855.87,5656.53 18987.34,5788 19203.07,5788 19328,5663.07 19328,5201.37 19438,5091.37 19438,5061.17 19456.17,5043 19493.59,5043 J5.15@19495,5044.41 ; 19448.9,5050.27 ccw(c19460.63,5062) J5.15@19460.63,5045.41
G3_TFT: J5.16 U10.71 | length 1580.3
  Top Layer w8: U10.71@18919.61,5379.21 18919.61,5432.61 18870.87,5481.35 18870.87,5650.32 18993.55,5773 19196.85,5773 19313,5656.85 19313,5195.16 19423,5085.16 19423,5054.96 19453.23,5024.73 J5.16@19495,5024.73 ; 19446.29,5031.67 ccw(c19460.63,5046) J5.16@19460.63,5025.73
G4_TFT: J5.17 U10.70 | length 1560.6
  Top Layer w8: U10.70@18935.35,5379.21 18935.35,5438.07 18885.87,5487.56 18885.87,5644.1 18999.76,5758 19190.64,5758 19298,5650.64 19298,5188.94 19408,5078.94 19408,5048.74 19451.7,5005.04 J5.17@19495,5005.04 ; 19443.68,5013.06 ccw(c19460.63,5030.01) J5.17@19460.63,5006.04
G5_TFT: J5.18 U10.69 | length 1588.4
  Top Layer w8: U10.69@18951.1,5379.21 18951.1,5443.54 18900.87,5493.77 18900.87,5637.89 19005.98,5743 19184.43,5743 19283,5644.43 19283,5182.73 19393,5072.73 ; 19344,5121.73 19393,5072.73 ; J5.18@19495,4985.36 19450.17,4985.36 19393,5042.53 19393,5072.73
G6_TFT: J5.19 U10.68 | length 1496.5
  Top Layer w8: U10.68@18966.85,5379.21 18966.85,5449 18915.87,5499.99 18915.87,5631.68 19012.19,5728 19178.21,5728 19268,5638.21 19268,5176.52 19377.26,5067.26 19377.26,5037.06 19448.65,4965.67 J5.19@19495,4965.67
G7_TFT: J5.20 U10.67 | length 1473.9
  Top Layer w8: U10.67@18982.6,5379.21 18982.6,5454.47 18930.87,5506.2 18930.87,5625.46 19018.4,5713 19172,5713 19253,5632 19253,5170.3 19361.27,5062.03 19361.27,5031.83 19447.12,4945.99 J5.20@19495,4945.99